# Altium PCB ESC_GEMINI.PcbDoc (part 2 of 4)
Units mm, origin at the board's own origin, x right, y up, seen from the top; angles counter-clockwise.
Board outline 12 x 35 mm, 6 copper layers (F.Cu, In1.Cu, In2.Cu, In3.Cu, In4.Cu, B.Cu); 97 components, 64 nets, 285 pads, 618 vias.
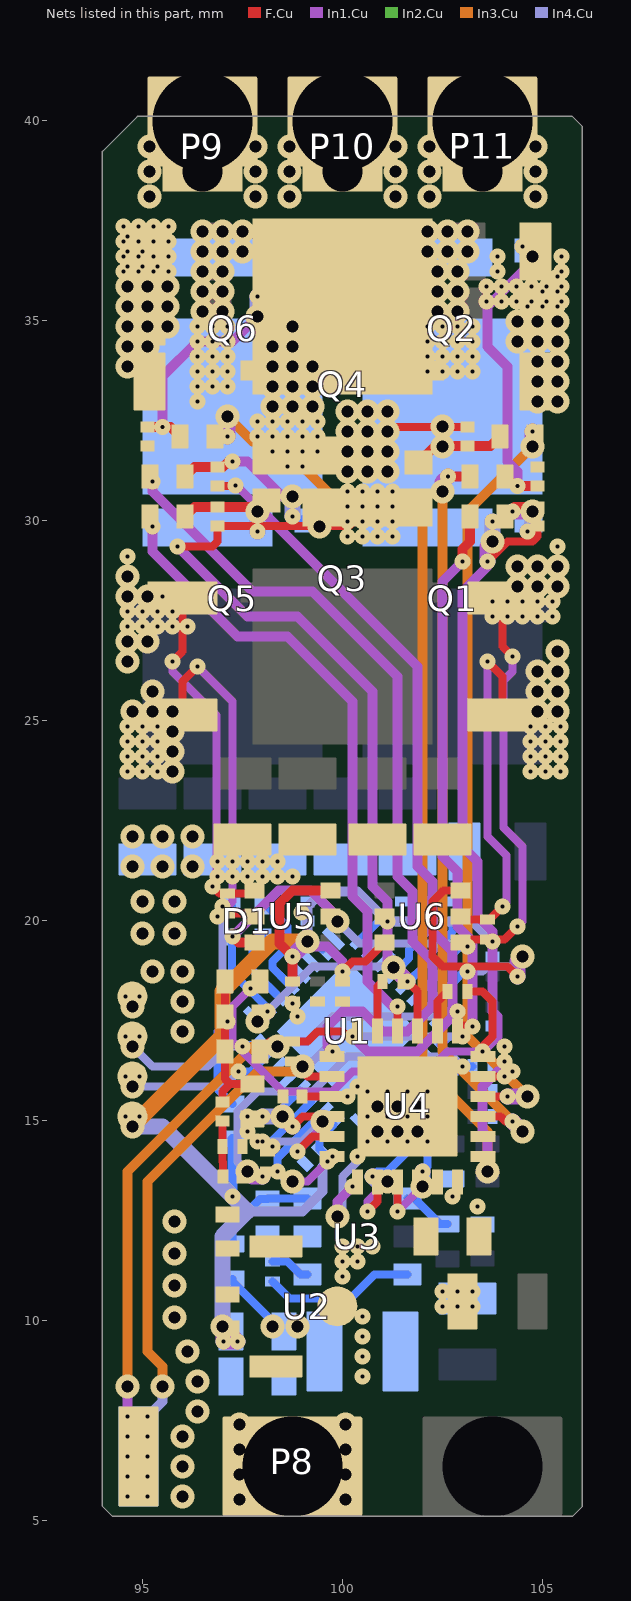
[diagram p6: the nets of this part, all layers, seen from the top]

## Design rules (kind name [scope] priority, off if disabled: settings) (continued)
PolygonConnect Polygon_F.Cu-/CTRL/VREF_U_ConnectDirect [IsNamedPolygon('F.Cu-/CTRL/VREF_U')] p219: connectstyle=Direct reliefconductorwidth=0.254 reliefentries=4 polygonreliefangle="90 Angle" airgapwidth=0.254
PolygonConnect Polygon_F.Cu-+3V3-4_ConnectDirect [IsNamedPolygon('F.Cu-+3V3-4')] p220: connectstyle=Direct reliefconductorwidth=0.254 reliefentries=4 polygonreliefangle="90 Angle" airgapwidth=0.254
PolygonConnect Polygon_F.Cu-VBUS-1_ConnectDirect [IsNamedPolygon('F.Cu-VBUS-1')] p221: connectstyle=Direct reliefconductorwidth=0.254 reliefentries=4 polygonreliefangle="90 Angle" airgapwidth=0.254
PolygonConnect Polygon_F.Cu-/GND_A-2_ConnectDirect [IsNamedPolygon('F.Cu-/GND_A-2')] p222: connectstyle=Direct reliefconductorwidth=0.254 reliefentries=4 polygonreliefangle="90 Angle" airgapwidth=0.254
PolygonConnect Polygon_F.Cu-/CTRL/PWM-AP_ConnectDirect [IsNamedPolygon('F.Cu-/CTRL/PWM-AP')] p223: connectstyle=Direct reliefconductorwidth=0.254 reliefentries=4 polygonreliefangle="90 Angle" airgapwidth=0.254
PolygonConnect Polygon_F.Cu-Net-(U4-TG_C)_ConnectDirect [IsNamedPolygon('F.Cu-Net-(U4-TG_C)')] p224: connectstyle=Direct reliefconductorwidth=0.254 reliefentries=4 polygonreliefangle="90 Angle" airgapwidth=0.254
PolygonConnect Polygon_F.Cu-+3V3-3_ConnectDirect [IsNamedPolygon('F.Cu-+3V3-3')] p225: connectstyle=Direct reliefconductorwidth=0.254 reliefentries=4 polygonreliefangle="90 Angle" airgapwidth=0.254
PolygonConnect Polygon_F.Cu-/GND_A-1_ConnectDirect [IsNamedPolygon('F.Cu-/GND_A-1')] p226: connectstyle=Direct reliefconductorwidth=0.254 reliefentries=4 polygonreliefangle="90 Angle" airgapwidth=0.254
PolygonConnect Polygon_F.Cu-/CTRL/PHB-1_ConnectDirect [IsNamedPolygon('F.Cu-/CTRL/PHB-1')] p227: connectstyle=Direct reliefconductorwidth=0.254 reliefentries=4 polygonreliefangle="90 Angle" airgapwidth=0.254
PolygonConnect Polygon_F.Cu-Net-(Q6-Gate)-1_ConnectDirect [IsNamedPolygon('F.Cu-Net-(Q6-Gate)-1')] p228: connectstyle=Direct reliefconductorwidth=0.254 reliefentries=4 polygonreliefangle="90 Angle" airgapwidth=0.254
PolygonConnect Polygon_F.Cu-Net-(Q1-Gate)-1_ConnectDirect [IsNamedPolygon('F.Cu-Net-(Q1-Gate)-1')] p229: connectstyle=Direct reliefconductorwidth=0.254 reliefentries=4 polygonreliefangle="90 Angle" airgapwidth=0.254
PolygonConnect Polygon_F.Cu-Net-(Q1-Gate)_ConnectDirect [IsNamedPolygon('F.Cu-Net-(Q1-Gate)')] p230: connectstyle=Direct reliefconductorwidth=0.254 reliefentries=4 polygonreliefangle="90 Angle" airgapwidth=0.254
PolygonConnect Polygon_F.Cu-+3V3-2_ConnectDirect [IsNamedPolygon('F.Cu-+3V3-2')] p231: connectstyle=Direct reliefconductorwidth=0.254 reliefentries=4 polygonreliefangle="90 Angle" airgapwidth=0.254
PolygonConnect Polygon_F.Cu-+6V_ConnectDirect [IsNamedPolygon('F.Cu-+6V')] p232: connectstyle=Direct reliefconductorwidth=0.254 reliefentries=4 polygonreliefangle="90 Angle" airgapwidth=0.254
PolygonConnect Polygon_F.Cu-Net-(Q5-Gate)_ConnectDirect [IsNamedPolygon('F.Cu-Net-(Q5-Gate)')] p233: connectstyle=Direct reliefconductorwidth=0.254 reliefentries=4 polygonreliefangle="90 Angle" airgapwidth=0.254
PolygonConnect Polygon_F.Cu-/CTRL/BEMF_U_ConnectDirect [IsNamedPolygon('F.Cu-/CTRL/BEMF_U')] p234: connectstyle=Direct reliefconductorwidth=0.254 reliefentries=4 polygonreliefangle="90 Angle" airgapwidth=0.254
PolygonConnect Polygon_F.Cu-/CTRL/PWM-BN_ConnectDirect [IsNamedPolygon('F.Cu-/CTRL/PWM-BN')] p235: connectstyle=Direct reliefconductorwidth=0.254 reliefentries=4 polygonreliefangle="90 Angle" airgapwidth=0.254
PolygonConnect Polygon_F.Cu-/CTRL/I_SNS_B_ConnectDirect [IsNamedPolygon('F.Cu-/CTRL/I_SNS_B')] p236: connectstyle=Direct reliefconductorwidth=0.254 reliefentries=4 polygonreliefangle="90 Angle" airgapwidth=0.254
PolygonConnect Polygon_F.Cu-/CTRL/PHC-1_ConnectDirect [IsNamedPolygon('F.Cu-/CTRL/PHC-1')] p237: connectstyle=Direct reliefconductorwidth=0.254 reliefentries=4 polygonreliefangle="90 Angle" airgapwidth=0.254
PolygonConnect Polygon_F.Cu-GND-1_ConnectDirect [IsNamedPolygon('F.Cu-GND-1')] p238: connectstyle=Direct reliefconductorwidth=0.254 reliefentries=4 polygonreliefangle="90 Angle" airgapwidth=0.254
PolygonConnect Polygon_F.Cu-/GND_C-2_ConnectDirect [IsNamedPolygon('F.Cu-/GND_C-2')] p239: connectstyle=Direct reliefconductorwidth=0.254 reliefentries=4 polygonreliefangle="90 Angle" airgapwidth=0.254
PolygonConnect Polygon_F.Cu-/CTRL/PHB_ConnectDirect [IsNamedPolygon('F.Cu-/CTRL/PHB')] p240: connectstyle=Direct reliefconductorwidth=0.254 reliefentries=4 polygonreliefangle="90 Angle" airgapwidth=0.254
PolygonConnect Polygon_F.Cu-Net-(U4-TG_B)_ConnectDirect [IsNamedPolygon('F.Cu-Net-(U4-TG_B)')] p241: connectstyle=Direct reliefconductorwidth=0.254 reliefentries=4 polygonreliefangle="90 Angle" airgapwidth=0.254
PolygonConnect Polygon_F.Cu-/CTRL/PHA_ConnectDirect [IsNamedPolygon('F.Cu-/CTRL/PHA')] p242: connectstyle=Direct reliefconductorwidth=0.254 reliefentries=4 polygonreliefangle="90 Angle" airgapwidth=0.254
PolygonConnect Polygon_F.Cu-GND_ConnectDirect [IsNamedPolygon('F.Cu-GND')] p243: connectstyle=Direct reliefconductorwidth=0.254 reliefentries=4 polygonreliefangle="90 Angle" airgapwidth=0.254
PolygonConnect Polygon_F.Cu-+3V3-1_ConnectDirect [IsNamedPolygon('F.Cu-+3V3-1')] p244: connectstyle=Direct reliefconductorwidth=0.254 reliefentries=4 polygonreliefangle="90 Angle" airgapwidth=0.254
PolygonConnect Polygon_F.Cu-VBUS_ConnectDirect [IsNamedPolygon('F.Cu-VBUS')] p245: connectstyle=Direct reliefconductorwidth=0.254 reliefentries=4 polygonreliefangle="90 Angle" airgapwidth=0.254
PolygonConnect Polygon_F.Cu-/CTRL/PHC_ConnectDirect [IsNamedPolygon('F.Cu-/CTRL/PHC')] p246: connectstyle=Direct reliefconductorwidth=0.254 reliefentries=4 polygonreliefangle="90 Angle" airgapwidth=0.254
PolygonConnect Polygon_F.Cu-/GND_C-1_ConnectDirect [IsNamedPolygon('F.Cu-/GND_C-1')] p247: connectstyle=Direct reliefconductorwidth=0.254 reliefentries=4 polygonreliefangle="90 Angle" airgapwidth=0.254
PolygonConnect Polygon_F.Cu-/CTRL/I_SNS_A_ConnectDirect [IsNamedPolygon('F.Cu-/CTRL/I_SNS_A')] p248: connectstyle=Direct reliefconductorwidth=0.254 reliefentries=4 polygonreliefangle="90 Angle" airgapwidth=0.254
PolygonConnect Polygon_F.Cu-Net-(Q6-Gate)_ConnectDirect [IsNamedPolygon('F.Cu-Net-(Q6-Gate)')] p249: connectstyle=Direct reliefconductorwidth=0.254 reliefentries=4 polygonreliefangle="90 Angle" airgapwidth=0.254
PolygonConnect Polygon_F.Cu-/CTRL/PWM-BP_ConnectDirect [IsNamedPolygon('F.Cu-/CTRL/PWM-BP')] p250: connectstyle=Direct reliefconductorwidth=0.254 reliefentries=4 polygonreliefangle="90 Angle" airgapwidth=0.254
PolygonConnect Polygon_F.Cu-Net-(U4-BG_A)_ConnectDirect [IsNamedPolygon('F.Cu-Net-(U4-BG_A)')] p251: connectstyle=Direct reliefconductorwidth=0.254 reliefentries=4 polygonreliefangle="90 Angle" airgapwidth=0.254
PolygonConnect Polygon_F.Cu-/GND_A_ConnectDirect [IsNamedPolygon('F.Cu-/GND_A')] p252: connectstyle=Direct reliefconductorwidth=0.254 reliefentries=4 polygonreliefangle="90 Angle" airgapwidth=0.254
PolygonConnect Polygon_F.Cu-Net-(Q2-Gate)_ConnectDirect [IsNamedPolygon('F.Cu-Net-(Q2-Gate)')] p253: connectstyle=Direct reliefconductorwidth=0.254 reliefentries=4 polygonreliefangle="90 Angle" airgapwidth=0.254
PolygonConnect Polygon_F.Cu-/GND_C_ConnectDirect [IsNamedPolygon('F.Cu-/GND_C')] p254: connectstyle=Direct reliefconductorwidth=0.254 reliefentries=4 polygonreliefangle="90 Angle" airgapwidth=0.254
PolygonConnect Polygon_F.Cu-+3V3_ConnectDirect [IsNamedPolygon('F.Cu-+3V3')] p255: connectstyle=Direct reliefconductorwidth=0.254 reliefentries=4 polygonreliefangle="90 Angle" airgapwidth=0.254
RoutingVias [All] p1: holewidth=0.711 width=1.27 viastyle="Through Hole" minholewidth=0.711 minwidth=1.27 maxholewidth=0.711 maxwidth=1.27
SilkToSilkClearance [All] p1: silktosilkclearance=0
SilkToSolderMaskClearance [IsPad] p1: minsilkscreentomaskgap=0 clearancetoexposedcopper=TRUE
SolderMaskExpansion [All] p1: expansion=0.102 istentingtop=FALSE
Width [All] p1: maxlimit=10 minlimit=0.254 preferedwidth=0.254 minimp=50.000000 maximp=50.000000 favimp=50.000000
27 further rules are at their usual default settings.

## Components (designator, comment, footprint, x,y, rotation, side; value= is the part's Value field where it differs from the comment)
C2 "10uF" C0805(2012M)#1 99.125,22.85 r270 top
C3 "10uF" C0805(2012M)#1 100.875,22.85 r270 top
C4 "10uF" C0805(2012M)#1 102.5,22.85 r270 top
C7 "10uF" C0805(2012M)#2 95.125,22.35 r90 bottom
C8 "10uF" C0805(2012M)#2 96.75,22.35 r90 bottom
C9 "10uF" C0805(2012M)#2 98.375,22.35 r90 bottom
C10 "10uF" C0805(2012M)#2 100,22.35 r90 bottom
C11 "10uF" C0805(2012M)#2 101.625,22.35 r90 bottom
C12 "10uF" C0805(2012M)#2 103.875,21.725 r0 bottom
C13 "10uF" C0805(2012M)#1 97.5,22.85 r270 top
C14 "10uF" C0805(2012M)#1 96,33.475 r180 top
C16 "10uF" C0805(2012M)#1 104,33.475 r0 top
C17 "10nF" C0201(0603M)#1 103.5,15.725 r180 bottom
C18 "100nF" C0201(0603M)#1 102.125,20.225 r270 bottom
C19 "10nF" C0201(0603M)#1 103.5,16.35 r180 bottom
C20 "100nF" C0201(0603M)#1 101.5,20.225 r270 bottom
C21 "100nF" C0201(0603M)#1 99.25,14.1 r45 bottom
C22 "100nF" C0201(0603M)#1 102.75,20.225 r270 bottom
C24 "10uF" C0805(2012M)#2 103.125,9.725 r270 bottom
C25 "1uF" C0402(1005M)#1 97.125,12.225 r270 top
C26 "100nF" C0402(1005M)#2 103.5,11.975 r270 bottom
C27 "10nF" C0201(0603M)#2 97.25,14.35 r0 top
C28 "1uF" C0402(1005M)#1 97.125,10.225 r90 top
C29 "10nF" C0201(0603M)#2 98.125,13.975 r90 top
C30 "100nF" C0201(0603M)#1 98.25,11.225 r90 bottom
C31 "10nF" C0201(0603M)#1 103.5,15.1 r180 bottom
C33 "10uF" C0603(1608M)#1 97.875,9.725 r0 bottom
C34 "10uF" C0603(1608M)#1 97.875,8.6 r0 bottom
C41 "10uF" C0603(1608M)#2 102.75,12.1 r0 top
C42 "1uF" C0201(0603M)#2 102.875,18.225 r0 top
C43 "1uF" C0201(0603M)#2 101.25,18.475 r0 top
C44 "1uF" C0201(0603M)#2 98.75,16.725 r90 top
C45 "100nF" C0201(0603M)#2 100,18.225 r270 top
C46 "10nF" C0201(0603M)#2 99.375,18.225 r270 top
C47 "100nF" C0201(0603M)#2 98.75,18.225 r270 top
C48 "100pF" C0201(0603M)#2 103.625,19.775 r90 top
C49 "100pF" C0201(0603M)#2 97.125,20.425 r270 top
C50 "10uF" C0805(2012M)#1 96,35.1 r180 top
C51 "10uF" C0805(2012M)#1 96,36.725 r180 top
C53 "10uF" C0805(2012M)#1 104,35.1 r0 top
C54 "10uF" C0805(2012M)#1 104,36.725 r0 top
D1 "NH-B1010RGBT-HF" LED-4_1010 97.625,19.975 r0 bottom
L1 "22uH" MC-2520 100.5,9.225 r0 bottom
P1 "V" SMP-C_b7 94.75,15.1 r0 top
P2 "G" SMP-C_b7 94.75,18.1 r0 top
P3 "TX" SMP-Q_2510 94.9,6.6 r90 top
P4 "RX" SMP-Q_2510 94.9,6.6 r90 bottom
P5 "D" SMP-C_b7 94.75,16.1 r0 top
P6 "K" SMP-C_b7 94.75,17.1 r0 top
P7 "Solder Pad" EGP-Q_3525 103.75,5.1 r0 top
P8 "Solder Pad" EGP-Q_3525 98.75,5.1 r0 top
P9 "Solder Pad" EGP-Q_2722 96.5,40.225 r180 top
P10 "Solder Pad" EGP-Q_2722 100,40.225 r180 top
P11 "Solder Pad" EGP-Q_2722 103.5,40.225 r180 top
Q1 "HSBA4052" SON-FET_6050#1 102.75,27.1 r180 bottom
Q2 "HSBA4052" SON-FET_6050#2 102.75,33.85 r180 bottom
Q3 "HSBA4052" SON-FET_6050#3 100,27.6 r180 top
Q4 "HSBA4052" SON-FET_6050#3 100,34.35 r0 top
Q5 "HSBA4052" SON-FET_6050#1 97.25,27.1 r180 bottom
Q6 "HSBA4052" SON-FET_6050#4 97.25,33.85 r180 bottom
R1 "10k" R0201(0603M)#1 99.125,20.225 r270 bottom
R2 "11k" R0402(1005M)#1 97.5,16.725 r180 top
R3 "11k" R0402(1005M)#1 97.5,17.6 r180 top
R4 "680R" R0402(1005M)#1 97.75,15.475 r270 top
R5 "11k" R0402(1005M)#1 97.5,18.475 r180 top
R6 "100" R0201(0603M)#2 97,15.225 r270 top
R7 "1Meg" R0402(1005M)#2 102.625,11.975 r270 bottom
R8 "100" R0201(0603M)#2 97.25,13.6 r0 top
R9 "10k" R0201(0603M)#1 103.75,18.85 r90 bottom
R10 "10k" R0201(0603M)#1 103.75,17.6 r90 bottom
R11 "68k" R0402(1005M)#2 97.25,11.475 r270 bottom
R12 "11k" R0402(1005M)#2 98.125,12.6 r270 bottom
R13 "11k" R0402(1005M)#2 103.625,13.975 r270 bottom
R14 "1k" R0402(1005M)#2 102.75,13.975 r90 bottom
R15 "330R" R0402(1005M)#2 97.25,14.975 r270 bottom
R16 "100k" R0201(0603M)#2 98.75,15.6 r0 top
R17 "2.2R" R0402(1005M)#1 103.625,30.1 r0 top
R18 "2.2R" R0402(1005M)#1 103.625,31.1 r0 top
R19 "2.2R" R0402(1005M)#1 95.625,30.1 r0 top
R20 "2.2R" R0402(1005M)#1 104.375,32.1 r180 top
R21 "10k" R0201(0603M)#2 104.875,30.1 r270 top
R22 "10k" R0201(0603M)#2 104.875,31.1 r90 top
R23 "2.2R" R0402(1005M)#1 95.625,31.1 r0 top
R24 "2.2R" R0402(1005M)#1 96.375,32.1 r180 top
R25 "10k" R0201(0603M)#2 96.875,30.1 r270 top
R26 "10k" R0201(0603M)#2 103.125,32.1 r90 top
R27 "1mR" R1206(3216M) 104,26.6 r90 top
R28 "10k" R0201(0603M)#2 96.875,31.1 r270 top
R29 "10k" R0201(0603M)#2 95.125,32.1 r270 top
R30 "1mR" R1206(3216M) 96,26.6 r90 top
R31 "SDV2012A300C181NPTF" R0805(2012M) 103.875,10.475 r0 top
U1 "AT32F413KCU7-4" QFN-32_4040 100.125,17.225 r45 bottom
U2 "GM7333" SOT-89_4525 99.875,10.35 r180 top
U3 "LGS5148" SOT-23-6 100.375,12.1 r0 bottom
U4 "DRV8300D" QFN-24_4040 101.625,15.35 r90 top
U5 "INA199A1" SOT-363 98.75,20.1 r0 top
U6 "INA199A1" SOT-363 102,20.1 r180 top

## Footprints (in the part's own frame and the unit in brackets; to place one, negate y for a bottom-side part, rotate by r counter-clockwise, add the part's x,y. Pads: shape width x height; smd on the part's side, far side on the other; paste and mask are expansions set on the pad)
C0201(0603M)#1 [mm]
  rrect5% 0.25x0.375 smd paste-0.032 mask+0.025: 1(0.25,0) 2(-0.25,0)
  silkscreen extent -0.35,-0.29 0.35,0.29
C0201(0603M)#2 [mm]
  rrect5% 0.25x0.375 smd paste-0.032 mask+0.025: 1(-0.25,0) 2(0.25,0)
  silkscreen extent -0.35,-0.29 0.35,0.29
C0402(1005M)#1 [mm]
  rrect5% 0.4x0.6 smd paste-0.05 mask+0.05: 1(-0.425,0) 2(0.425,0)
  silkscreen extent -0.6,-0.45 0.6,0.45
C0402(1005M)#2 [mm]
  rrect5% 0.4x0.6 smd paste-0.05 mask+0.05: 1(0.425,0) 2(-0.425,0)
  silkscreen extent -0.6,-0.45 0.6,0.45
C0603(1608M)#1 [mm]
  rrect5% 0.625x0.95 smd paste-0.95 mask+0.05: 1(0.663,0) 2(-0.663,0)
  silkscreen extent -0.95,-0.63 0.95,0.63
C0603(1608M)#2 [mm]
  rrect5% 0.625x0.95 smd paste-0.95 mask+0.05: 1(-0.663,0) 2(0.663,0)
  silkscreen extent -0.95,-0.63 0.95,0.63
C0805(2012M)#1 [mm]
  rrect5% 0.8x1.45 smd paste-1.45 mask+0.05: 1(-0.825,0) 2(0.825,0)
C0805(2012M)#2 [mm]
  rrect5% 0.8x1.45 smd paste-1.45 mask+0.05: 1(0.825,0) 2(-0.825,0)
EGP-Q_2722 [mm]
  rect 1x1.5 hole 1 slot 2.5 at 90 deg paste-1.5 mask+0.05: PAD(-0.5,0.25) PAD(0.5,0.25)
  rect 2x1 hole 1 slot 2 at 0 deg paste-2 mask+0.05: PAD(0,1.5)
  rrect5% 2.75x2.25 hole 2.5 slot 2 at 0 deg paste-2.75 mask+0.05: PAD(0,0.25)
EGP-Q_3525 [mm]
  rect 1x1.5 hole 1 slot 2.5 at 90 deg paste-1.5 mask+0.05: PAD(-0.5,1.25) PAD(0.5,1.25)
  rrect5% 3.5x2.5 hole 2.5 slot 2 at 0 deg paste-3.5 mask+0.05: PAD(0,1.25)
  rect 2x1 hole 1 slot 2 at 0 deg paste-2 mask+0.05: PAD(0,1.5)
LED-4_1010 [mm]
  rrect5% 0.425x0.425 smd paste-0.05 mask+0.05: 1(-0.387,-0.387) 2(0.387,-0.387) 3(0.387,0.387) 4(-0.387,0.387)
  silkscreen extent -0.95,-0.75 0.75,0.75
MC-2520 [mm]
  rrect5% 0.9x2 smd paste-0.1 mask+0.05: 1(0.95,0) 2(-0.95,0)
  silkscreen extent -1.35,-1.17 1.35,1.17
QFN-24_4040 [mm]
  rrect5% 0.625x0.275 smd paste-0.05 mask+0.025: 1(-1.887,1.25) 2(-1.887,0.75) 3(-1.887,0.25) 4(-1.887,-0.25) 5(-1.887,-0.75) 6(-1.887,-1.25) 13(1.887,-1.25) 14(1.887,-0.75) 15(1.887,-0.25) 16(1.887,0.25) 17(1.887,0.75) 18(1.887,1.25)
  rrect5% 0.275x0.625 smd paste-0.05 mask+0.025: 7(-1.25,-1.887) 8(-0.75,-1.887) 9(-0.25,-1.887) 10(0.25,-1.887) 11(0.75,-1.887) 12(1.25,-1.887) 19(1.25,1.887) 20(0.75,1.887) 21(0.25,1.887) 22(-0.25,1.887) 23(-0.75,1.887) 24(-1.25,1.887)
  rrect2% 2.5x2.5 smd paste-2.5 mask+0.05: EP(0,0)
  silkscreen extent -2.3,-2.1 2.1,2.3
QFN-32_4040 [mm]
  rrect5% 0.625x0.2 smd paste-0.05 mask+0.025: 1(1.887,-1.4) 2(1.887,-1) 3(1.887,-0.6) 4(1.888,-0.2) 5(1.888,0.2) 6(1.887,0.6) 7(1.887,1) 8(1.887,1.4) 17(-1.887,1.4) 18(-1.887,1) 19(-1.887,0.6) 20(-1.888,0.2) 21(-1.888,-0.2) 22(-1.887,-0.6) 23(-1.887,-1) 24(-1.887,-1.4)
  rrect5% 0.2x0.625 smd paste-0.05 mask+0.025: 9(1.4,1.887) 10(1,1.887) 11(0.6,1.887) 12(0.2,1.888) 13(-0.2,1.888) 14(-0.6,1.887) 15(-1,1.887) 16(-1.4,1.887) 25(-1.4,-1.887) 26(-1,-1.887) 27(-0.6,-1.887) 28(-0.2,-1.888) 29(0.2,-1.888) 30(0.6,-1.887) 31(1,-1.887) 32(1.4,-1.887)
  rrect2% 2.5x2.5 smd paste-2.5 mask+0.05: EP(0,0)
  silkscreen extent -2.1,-2.3 2.3,2.1
R0201(0603M)#1 [mm]
  rrect5% 0.275x0.35 smd paste-0.032 mask+0.025: 1(0.238,0) 2(-0.238,0)
  silkscreen extent -0.35,-0.28 0.35,0.28
R0201(0603M)#2 [mm]
  rrect5% 0.275x0.35 smd paste-0.032 mask+0.025: 1(-0.238,0) 2(0.238,0)
  silkscreen extent -0.35,-0.28 0.35,0.28
R0402(1005M)#1 [mm]
  rrect5% 0.425x0.6 smd paste-0.05 mask+0.05: 1(-0.437,0) 2(0.437,0)
  silkscreen extent -0.63,-0.45 0.63,0.45
R0402(1005M)#2 [mm]
  rrect5% 0.425x0.6 smd paste-0.05 mask+0.05: 1(0.437,0) 2(-0.437,0)
  silkscreen extent -0.63,-0.45 0.63,0.45
R0805(2012M) [mm]
  rrect5% 0.75x1.4 smd paste-1.4 mask+0.05: 1(-0.875,0) 2(0.875,0)
  silkscreen extent -1.2,-0.87 1.2,0.87
R1206(3216M) [mm]
  rrect5% 0.825x1.75 smd paste-1.75 mask+0.05: 1(-1.462,0) 2(1.462,0)
  silkscreen extent -1.83,-1.05 1.83,1.05
SMP-C_b7 [mm]
  round 0.75 smd paste-0.2 mask+0.05: PAD(0,0)
SMP-Q_2510 [mm]
  rrect5% 2.5x1 smd paste-0.1 mask+0.05: PAD(0,0)
SON-FET_6050#1 [mm]
  rrect5% 0.5x0.5 smd paste-0.5 mask+0.05: D(-2.3,0.6) D(2.3,0.6)
  rect 4.5x4.4 smd paste-4.5 mask-4.5: D(0,-1)
  rect 0.7x0.6 smd paste-0.05 mask+0.05: G(-1.9,2.9)
  rect 3.25x0.95 smd paste-3.25 mask-3.25: S(0.625,2.725)
  silkscreen extent -2.75,-3.1 2.75,3.57
SON-FET_6050#2 [mm]
  rrect5% 0.4x0.5 smd paste-0.5 mask+0.05: D(-2.25,0.6)
  rect 4.5x4.4 smd paste-4.5 mask-4.5: D(0,-1)
  rrect5% 0.45x0.5 smd paste-0.5 mask+0.05: D(2.275,0.6)
  rect 0.7x0.6 smd paste-0.05 mask+0.05: G(-1.9,2.9)
  rect 3.25x0.95 smd paste-3.25 mask-3.25: S(0.625,2.725)
  silkscreen extent -2.75,-3.1 2.75,3.57
SON-FET_6050#3 [mm]
  rrect5% 0.5x0.5 smd paste-0.5 mask+0.05: D(-2.3,-0.6) D(2.3,-0.6)
  rect 4.5x4.4 smd paste-4.5 mask-4.5: D(0,1)
  rect 0.7x0.6 smd paste-0.05 mask+0.05: G(1.9,-2.9)
  rect 3.25x0.95 smd paste-3.25 mask-3.25: S(-0.625,-2.725)
  silkscreen extent -2.75,-3.57 2.75,3.1
SON-FET_6050#4 [mm]
  rrect5% 0.45x0.5 smd paste-0.5 mask+0.05: D(-2.275,0.6)
  rect 4.5x4.4 smd paste-4.5 mask-4.5: D(0,-1)
  rrect5% 0.4x0.5 smd paste-0.5 mask+0.05: D(2.25,0.6)
  rect 0.7x0.6 smd paste-0.05 mask+0.05: G(-1.9,2.9)
  rect 3.25x0.95 smd paste-3.25 mask-3.25: S(0.625,2.725)
  silkscreen extent -2.75,-3.1 2.75,3.57
SOT-23-6 [mm]
  rrect5% 0.7x0.55 smd mask+0.05: 1(-1.25,0.95) 2(-1.25,0) 3(-1.25,-0.95) 4(1.25,-0.95) 5(1.25,0) 6(1.25,0.95)
  silkscreen extent -0.7,-1.55 0.7,1.55
SOT-89_4525 [mm]
  rrect5% 1.325x0.55 smd paste-0.1 mask+0.05: 1(1.538,-1.5) 3(1.538,1.5)
  round 1 smd paste-1 mask+0.05: 2(0,0)
  F.Cu region: 0.7,0.45 0.7,0.275 0.75,0.225 2.15,0.225 2.15,-0.225 0.75,-0.225 0.7,-0.275 0.7,-0.45 0.325,-0.825 -2.1,-0.825 -2.15,-0.775 -2.15,0.775 -2.1,0.825 0.325,0.825
  silkscreen extent -1.6,-2.35 1.1,2.35
SOT-363 [mm]
  rrect5% 0.5x0.4 smd mask+0.05: 1(0.95,-0.65) 2(0.95,0) 3(0.95,0.65) 4(-0.95,0.65) 5(-0.95,0) 6(-0.95,-0.65)
  silkscreen extent -0.5,-1.2 1.15,1.1

## Part data
C2 C3 C4 C7 C8 C9 C10 C11 C12 C13 C14 C16 C24 C50 C51 C53 C54: library part C0805(2012M), Symbol type="Alternate Source"
  C2 C3 C4 C7 C8 C9 C10 C11 C12 C13 C14 C16 C50 C51 C53 C54: Sheetfile=ESC_SGL.kicad_sch
  C24: Sheetfile=ESC-CTRL.kicad_sch, Sheetname=CTRL
C17 C18 C19 C20 C21 C22 C27 C29 C30 C31 C42 C43 C44 C45 C46 C47 C48 C49: library part C0201(0603M), Symbol type="Alternate Source"
  C17 C18 C19 C20 C21 C22 C27 C29 C30 C31: Sheetfile=ESC-CTRL.kicad_sch, Sheetname=CTRL
  C42 C43 C44 C45 C46 C47 C48 C49: Sheetfile=PowerStack.kicad_sch, Sheetname=PowerStack
C25 C26 C28: library part C0402(1005M), Sheetfile=ESC-CTRL.kicad_sch, Sheetname=CTRL, Symbol type="Alternate Source"
C33 C34 C41: library part C0603(1608M), Symbol type="Alternate Source"
  C33 C34: Sheetfile=ESC-CTRL.kicad_sch, Sheetname=CTRL
  C41: Sheetfile=PowerStack.kicad_sch, Sheetname=PowerStack
D1: library part LED-4_1010, Sheetfile=ESC-CTRL.kicad_sch, Sheetname=CTRL
L1: library part MC-2520, Sheetfile=ESC-CTRL.kicad_sch, Sheetname=CTRL, Symbol type="Alternate Source"
P1 P2 P5 P6: library part SMP-C_b7, Sheetfile=ESC-CTRL.kicad_sch, Sheetname=CTRL, Symbol type="Alternate Source"
P3 P4: library part SMP-Q_2510, Sheetfile=ESC-CTRL.kicad_sch, Sheetname=CTRL, Symbol type="Alternate Source"
P7 P8: library part EGP-Q_3525, Sheetfile=ESC_SGL.kicad_sch, Symbol type="Alternate Source"
P9 P10 P11: library part EGP-Q_2722, Sheetfile=PowerStack.kicad_sch, Sheetname=PowerStack, Symbol type="Alternate Source"
Q1 Q2 Q3 Q4 Q5 Q6: library part SON-FET_6050, "Footprint for single MOSFET", Sheetfile=PowerStack.kicad_sch, Sheetname=PowerStack, Symbol type="Specified Device", ki_description=N_40V_50A_10.5m(6.9m)ohm_5.8n(12.5n)C_27.8W
R1 R6 R8 R9 R10 R16 R21 R22 R25 R26 R28 R29: library part R0201(0603M), Symbol type="Alternate Source"
  R1 R6 R8 R9 R10: Sheetfile=ESC-CTRL.kicad_sch, Sheetname=CTRL
  R16 R21 R22 R25 R26 R28 R29: Sheetfile=PowerStack.kicad_sch, Sheetname=PowerStack
R2 R3 R4 R5 R7 R11 R12 R13 R14 R15 R17 R18 R19 R20 R23 R24: library part R0402(1005M), Symbol type="Alternate Source"
  R2 R3 R4 R5 R7 R11 R12 R13 R14 R15: Sheetfile=ESC-CTRL.kicad_sch, Sheetname=CTRL
  R17 R18 R19 R20 R23 R24: Sheetfile=PowerStack.kicad_sch, Sheetname=PowerStack
R27 R30: library part R1206(3216M), Sheetfile=PowerStack.kicad_sch, Sheetname=PowerStack, Symbol type="Alternate Source"
R31: library part R0805(2012M), Sheetfile=ESC_SGL.kicad_sch, Symbol type="Alternate Source"
U1: library part QFN-32_4040, Sheetfile=ESC-CTRL.kicad_sch, Sheetname=CTRL, Symbol type="Specified Device", ki_description="Cortex-M4 200MHz, AT32F4 series."
U2: library part SOT-89_4525, Sheetfile=ESC-CTRL.kicad_sch, Sheetname=CTRL, Symbol type="Alternate Source", ki_description="Alternative group of 3 pins LDO (Pinout B)."
U3: library part SOT-23-6, LCSC=C5123972, Sheetfile=ESC-CTRL.kicad_sch, Sheetname=CTRL, Symbol type="Specified Device", ki_description=4.5-48V_0.6A_0.9MHz
U4: library part QFN-24_4040, Sheetfile=PowerStack.kicad_sch, Sheetname=PowerStack
U5 U6: library part SOT-363, Sheetfile=PowerStack.kicad_sch, Sheetname=PowerStack, Symbol type="Specified Device", ki_description=CS-S_2.7-26Vs_n0.3-26Vcm_50V/V_80kHz

## Via types
v1: diameter 0.4, hole 0.1, F.Cu to In1.Cu, tented both sides, 195 vias
v2: diameter 0.4, hole 0.1, In4.Cu to B.Cu, tented both sides, 187 vias
v3: diameter 0.6, hole 0.3, In1.Cu to In4.Cu, tented both sides, 159 vias
v4: diameter 0.6, hole 0.3, F.Cu to B.Cu, tented both sides, 77 vias

## Nets (pads, with @x,y where several pads share a name; then routed paths per layer and width w, separated by ;. In a path a pad name is that pad's centre, name@x,y a point inside that pad or via, vN(x,y) a via of type N, cw(c..) or ccw(c..) an arc to the next point about the centre after c; other vN are vias at no path point)
+3V3: C20.1 C21.1 C22.1 C28.1 C45.1 C47.1 P1.PAD R9.1 R15.1 U1.1 U1.5 U1.17 U2.3 U5.3 U6.3 | length 38.7
  F.Cu w0.2: C45.1@100,18.475 v1(100,18.725) 100.25,18.975 100.575,18.975 U6.3@101.05,19.45
  F.Cu w0.25: C47.1@98.75,18.475 98.75,18.725 v1(98.75,19.1) 98.425,19.425 98.425,20.425 98.75,20.75 U5.3@99.7,20.75
  In1.Cu w0.25: v3(99.125,19.475) 99.25,19.35 99.625,19.35 100,18.975 v1(100,18.725)
  In1.Cu w0.4: v1(98.75,19.1) v3(99.125,19.475) ; v3(97,9.85) 97.025,9.825 v1(97.025,9.475) v1(97.375,9.475) v3(97,9.85)
  In3.Cu w0.4: v3(94.75,14.85) 97,17.1 97,18.225 98.25,19.475 v3(99.125,19.475)
  In4.Cu w0.25: 97.625,12.725 99,12.725 99.5,13.225 99.5,13.85 v2(99.75,14.1) ; v3(99.125,19.475) 99.125,20.35 99.5,20.725 100.375,20.725 v2(101.125,19.975) 103.25,19.975 v2(103.75,19.475)
  In4.Cu w0.4: v3(94.75,14.85) 95.5,14.85 v2(97.25,13.1) 97.625,12.725 97,12.1 v3(97,9.85)
  B.Cu w0.2: v2(99.75,14.1) 99.604,14.1 C21.1@99.427,14.277 99.427,14.547 U1.17@99.78,14.9 ; U1.1@100.47,19.55 100.895,19.975 C20.1@101.5,19.975 ; U1.5@101.601,18.418 102.1,18.917 102.1,19.075 102.75,19.725 C22.1@102.75,19.975 103.25,19.975 v2(103.75,19.475) R9.1@103.75,19.088
  B.Cu w0.25: v2(97.25,13.1) R15.1@97.25,14.538
  other v1: 94.575,15.1 94.925,15.1
+6V: C25.1 C33.1 C34.1 C41.1 L1.2 R11.1 U2.2 U4.4 | length 1.6
  B.Cu w0.2: R11.1@97.25,11.038 97.25,10.975 98.25,9.975 v4(98.25,9.85)
  other v4: 98.875,9.85
B: D1.2 U1.28 | length 2.6
  B.Cu w0.2: D1.2@98.012,20.363 98.113,20.363 98.625,19.85 98.625,19.35 98.25,18.975 98.25,18.817 U1.28@98.649,18.418
BEMF: R2.2 R3.2 R4.1 R5.2 R6.1 | length 3.7
  F.Cu w0.2: R6.1@97,15.463 97,15.725 97.187,15.913 ; R5.2@97.063,18.475 R3.2@97.063,17.6 R2.2@97.063,16.725 97.063,16.038 97.187,15.913 ; R4.1@97.75,15.913 97.187,15.913
BEMF_U: C19.1 C29.1 R8.2 U1.10 | length 10.6
  F.Cu w0.2: 97.75,13.6 R8.2@97.488,13.6 v1(98,13.6) C29.1@98.125,13.725
  In1.Cu w0.4: v3(97.625,13.725) 97.75,13.6 v1(98,13.6)
  In4.Cu w0.2: v3(97.625,13.725) 97.375,13.975 97.375,15.225 97.875,15.725 99.25,15.725 100.125,16.6 102.75,16.6 v2(103,16.35)
  B.Cu w0.2: U1.10@102.167,16.597 102.539,16.225 102.875,16.225 v2(103,16.35) C19.1@103.25,16.35
G: D1.3 U1.27 | length 1.8
  B.Cu w0.2: D1.3@98.012,19.588 98.012,19.487 97.75,19.225 97.75,18.751 U1.27@98.366,18.135
GND: C2.2 C3.2 C4.2 C7.2 C8.2 C9.2 C10.2 C11.2 C12.2 C13.2 C17.2 C18.2 C19.2 C20.2 C21.2 C22.2 C24.2 C25.2 C26.2 C27.2 C28.2 C29.2 C31.2 C33.2 C34.2 C41.2 C45.2 C46.2 C47.2 C48.2 C49.2 P2.PAD P8.PAD Q4.S R1.2 R4.2 R10.2 R12.1 R14.2 R16.1 R26.2 R27.1 R30.1 R31.1 U1.EP U2.1 U3.2 U4.6 U4.EP U5.2 U5.5 U6.2 U6.5 | length 26.1
  F.Cu w0.2: R30.1@96,25.138 96,25.975 v1(96.375,26.35) ; v1(96.875,20.1) 96.95,20.175 C49.2@97.125,20.175 97.725,20.175 U5.5@97.8,20.1 ; Q4.S@99.375,31.625 100.412,31.625 101.125,32.338 R26.2@103.125,32.338 ; U6.5@102.95,20.1 103.025,20.025 C48.2@103.625,20.025 103.675,20.025 v1(104,20.35) ; v1(103.625,26.475) 104,26.1 R27.1@104,25.138
  In1.Cu w0.2: v1(96.375,26.35) 97.25,25.475 97.25,20.475 v1(96.875,20.1) ; v1(103.625,26.475) 103.625,22.1 104.1,21.625 104.1,20.45 v1(104,20.35)
  In2.Cu w0.5: v3(101.375,14.725) v3(101.875,14.725) v3(101.875,15.35) v3(101.375,15.35) ; v3(101.375,14.725) v3(101.375,15.35) ; v3(101.375,14.725) v3(100.875,14.725) v3(100.875,15.35) v3(101.375,15.35)
  other v1: 98.25,14.35 97.875,14.475 100.625,14.475 101.125,14.475 101.625,14.475 102.125,14.475 97.625,14.725 97.625,15.1 100.625,15.1 101.125,15.1 101.625,15.1 102.125,15.1 100.625,15.725 101.125,15.725 101.625,15.725 102.125,15.725 98.875,17.6 98.75,17.925 94.575,18.1 94.925,18.1 98.975,20.2 94.625,23.725 95,23.725 95.375,23.725 104.7,23.725 105.075,23.725 105.45,23.725 94.625,24.1 95,24.1 95.375,24.1 104.7,24.1 105.075,24.1 105.45,24.1 94.625,24.475 95,24.475 95.375,24.475 104.7,24.475 105.075,24.475 105.45,24.475 94.625,24.85 95,24.85 95.375,24.85 104.7,24.85 105.075,24.85 105.45,24.85 98.625,31.35 99,31.35 98.25,31.725 98.625,31.725 99,31.725 99.375,31.725 97.875,32.1 98.25,32.1 98.625,32.1 99,32.1 99.375,32.1 97.875,32.475 98.25,32.475 98.625,32.475 99,32.475 99.375,32.475
  other v2: 100.5,8.6 100.5,9.1 100.5,9.6 100.5,10.1 102.5,10.35 102.875,10.35 103.25,10.35 102.5,10.725 102.875,10.725 103.25,10.725 100,11.1 100,11.475 100.375,11.475 100,11.85 100.375,11.85 100.75,11.85 103.375,12.85 102.75,13.1 100.125,15.6 100.375,15.85 104.05,16.1 104.05,16.475 104.05,16.85 96.875,21.1 97.25,21.1 97.625,21.1 98,21.1 98.375,21.1 98.75,21.1 96.875,21.475 97.25,21.475 97.625,21.475 98,21.475 98.375,21.475
  other v3: 94.75,17.85 95.75,23.725 95.75,24.225 95.75,24.725 94.75,25.225 95.25,25.225 95.75,25.225 104.875,25.225 105.375,25.225 95.25,25.725 104.875,25.725 105.375,25.725 104.875,26.225 105.375,26.225 105.375,26.725 99.425,29.85 98.25,32.85 98.75,32.85 99.25,32.85 98.25,33.35 98.75,33.35 99.25,33.35 98.25,33.85 98.75,33.85 99.25,33.85 98.25,34.35 98.75,34.35 98.75,34.85
  other v4: 97.425,5.525 100.075,5.525 96,5.6 97.425,6.15 100.075,6.15 96,6.35 97.425,6.775 100.075,6.775 96,7.1 97.425,7.4 100.075,7.4 96.375,7.725 96.375,8.475 96.125,9.225 95.807,10.068 95.807,10.868 95.807,11.668 95.807,12.468 96,17.225 96,17.975 95.25,18.725 96,18.725 95.007,19.668 95.807,19.668 95.007,20.468 95.807,20.468 94.75,21.35 95.5,21.35 96.25,21.35 94.75,22.1 95.5,22.1 96.25,22.1
GND_A: C14.2 C49.1 C50.2 C51.2 Q6.S R29.2 R30.2 U5.4 | length 9
  F.Cu w0.2: v1(95.75,26.475) 96,26.725 R30.2@96,28.062 ; v1(96.75,20.85) 96.925,20.675 C49.1@97.125,20.675 97.725,20.675 U5.4@97.8,20.75
  In1.Cu w0.2: v1(95.75,26.475) 95.75,26.225 96.85,25.125 96.85,20.95 v1(96.75,20.85)
  other v1: 94.625,27.35 95,27.35 95.375,27.35 95.75,27.35 96.125,27.35 94.625,27.725 95,27.725 95.375,27.725 95.75,27.725 95.5,28.1 94.625,36.35 95,36.35 95.375,36.35 94.625,36.725 95,36.725 94.625,37.1
  other v2: 94.625,29.1 94.525,36.225 94.9,36.225 95.275,36.225 95.65,36.225 94.525,36.6 94.9,36.6 95.275,36.6 95.65,36.6 94.525,36.975 94.9,36.975 95.275,36.975 95.65,36.975 94.525,37.35 94.9,37.35 95.275,37.35 95.65,37.35
  other v3: 94.625,26.475 94.625,26.975 95.125,26.975 94.625,28.1 95.125,28.1 94.625,28.6 94.625,33.85 94.625,34.35 95.125,34.35 94.625,34.85 95.125,34.85 95.625,34.85 94.625,35.35 95.125,35.35 95.625,35.35 94.625,35.85 95.125,35.85 95.625,35.85
GND_C: C16.2 C48.1 C53.2 C54.2 Q2.S R22.2 R27.2 U6.4 | length 10.2
  F.Cu w0.2: U6.4@102.95,19.45 103.025,19.525 C48.1@103.625,19.525 104.05,19.525 v1(104.375,19.85) ; R27.2@104,28.062 104,26.85 v1(104.25,26.6)
  In1.Cu w0.2: v1(104.25,26.6) 104.25,26.225 104.025,26 104.025,22.325 104.5,21.85 104.5,19.975 v1(104.375,19.85)
  other v1: 103.75,27.6 104.125,27.6 104.5,27.6 104.875,27.6 105.25,27.6 103.75,27.975 104.125,27.975 104.5,27.975 104.875,27.975 105.25,27.975 104.625,35.35 105,35.35 105.375,35.35 105,35.725 105.375,35.725 105.375,36.1
  other v2: 105.375,29.35 103.6,35.475 103.975,35.475 104.35,35.475 104.725,35.475 105.1,35.475 105.475,35.475 103.6,35.85 103.975,35.85 104.35,35.85 104.725,35.85 105.1,35.85 105.475,35.85 103.875,36.225 105.475,36.225 103.875,36.6 105.475,36.6
  other v3: 104.375,28.35 104.875,28.35 105.375,28.35 104.375,28.85 104.875,28.85 105.375,28.85 102.5,31.85 102.5,32.35 104.875,32.975 105.375,32.975 104.875,33.475 105.375,33.475 104.875,33.975 105.375,33.975 104.375,34.475 104.875,34.475 105.375,34.475 104.375,34.975 104.875,34.975 105.375,34.975
I_SNS_A: U1.6 U5.6 | length 9.4
  F.Cu w0.25: v1(97.25,19.6) 97.4,19.45 U5.6@97.8,19.45
  In1.Cu w0.25: v1(97.25,19.6) 98.4,20.75 99.209,20.75 99.875,20.084 v3(99.875,19.975)
  In4.Cu w0.2: v3(99.875,19.975) 100.425,19.425 103.05,19.425 v2(103.125,19.35)
  B.Cu w0.2: U1.6@101.884,18.135 102.525,18.776 102.525,18.934 102.941,19.35 v2(103.125,19.35)
I_SNS_B: U1.7 U6.6 | length 7.9
  F.Cu w0.2: U6.6@102.95,20.75 102.525,20.75 102.25,20.475 102.25,19.1 102.5,18.85 104.125,18.85 v1(104.375,18.6)
  In1.Cu w0.4: v1(104.375,18.6) 104.375,18.975 v3(104.5,19.1)
  In4.Cu w0.2: v2(103.125,18.725) 103.5,18.725 103.625,18.85 104.25,18.85 v3(104.5,19.1)
  B.Cu w0.2: U1.7@102.167,17.853 103.039,18.725 v2(103.125,18.725)
Net-(C27-Pad1): C27.1 R6.2 R8.1 | length 1.4
  F.Cu w0.2: R6.2@97,14.988 C27.1@97,14.35 97,13.975 97.013,13.963 R8.1@97.013,13.6
Net-(D1-Anode): D1.1 R15.2 | length 5.5
  In4.Cu w0.2: v2(97,20.35) 97,17.6 v2(97.125,17.475)
  B.Cu w0.2: v2(97,20.35) 97.013,20.363 D1.1@97.237,20.363 ; v2(97.125,17.475) 96.875,17.225 96.875,15.788 R15.2@97.25,15.413
Net-(Q1-Gate): Q1.G R17.2 R21.1 | length 2
  F.Cu w0.25: R17.2@104.062,30.1 104.3,30.338 R21.1@104.875,30.338
  In1.Cu w0.4: v1(104.25,30.225) v3(104.75,30.225)
  In4.Cu w0.4: v2(104.625,29.725) 104.75,29.85 v3(104.75,30.225)
Net-(Q2-Gate): Q2.G R18.2 R22.1 | length 7.8
  F.Cu w0.25: R18.2@104.062,31.1 104.3,30.863 R22.1@104.875,30.863
  In1.Cu w0.25: v1(104.375,30.863) 104.375,31.225 104.125,31.475 104.125,33.841 103.625,34.341 103.625,35.35 104.75,36.475 v3(104.75,36.6)
  In4.Cu w0.4: v2(104.5,36.85) v3(104.75,36.6)
Net-(Q3-Gate): Q3.G R19.2 R25.1 | length 2.2
  F.Cu w0.25: R19.2@96.063,30.1 96.3,30.338 R25.1@96.875,30.338 97.938,30.338 Q3.G@98.1,30.5
Net-(Q4-Gate): Q4.G R20.2 R26.1 | length 2.3
  F.Cu w0.25: Q4.G@101.9,31.45 102.313,31.863 R26.1@103.125,31.863 103.7,31.863 R20.2@103.938,32.1
Net-(Q5-Gate): Q5.G R23.2 R28.1 | length 4.1
  F.Cu w0.25: R23.2@96.063,31.1 96.3,31.338 R28.1@96.875,31.338 97.013,31.338 97.15,31.475 v1(97.25,31.475)
  In1.Cu w0.25: v1(97.25,31.475) 97.625,31.475 98.5,30.6 v3(98.75,30.6)
  In4.Cu w0.4: v2(98.75,30.1) v3(98.75,30.6)
  B.Cu w0.25: v2(98.75,30.1) 98.85,30 Q5.G@99.15,30
Net-(Q6-Gate): Q6.G R24.2 R29.1 | length 8.2
  F.Cu w0.25: v1(95.501,32.339) 95.499,32.338 R29.1@95.125,32.338 95.7,32.338 R24.2@95.937,32.1
  In1.Cu w0.25: v1(95.501,32.339) 95.501,33.601 96.375,34.475 97.25,34.475 v3(97.875,35.1)
  In4.Cu w0.4: v3(97.875,35.1) v2(97.875,35.6)
  B.Cu w0.25: v2(97.875,35.6) 98.625,35.6 99.15,36.125 Q6.G@99.15,36.75
Net-(U1A-BOOT0): R1.1 U1.31 | length 0.9
  B.Cu w0.2: R1.1@99.125,19.988 99.125,19.639 U1.31@99.497,19.267
Net-(U1A-{\R\S\T\}\)\: C18.1 U1.4 | length 1.6
  B.Cu w0.2: U1.4@101.318,18.701 101.671,19.054 101.671,19.271 102.125,19.725 C18.1@102.125,19.975
Net-(U3-BST): C30.1 U3.1 | length 1
  B.Cu w0.2: C30.1@98.25,11.475 98.625,11.475 98.95,11.15 U3.1@99.125,11.15
Net-(U3-EN): R7.2 U3.4 | length 1.3
  B.Cu w0.2: U3.4@101.625,13.05 101.8,13.05 102.437,12.412 R7.2@102.625,12.412
Net-(U3-FB): R11.2 R12.2 U3.3 | length 2.6
  B.Cu w0.2: R11.2@97.25,11.913 97.25,12.35 97.938,13.037 R12.2@98.125,13.037 98.137,13.05 U3.3@99.125,13.05
Net-(U3-SW): C30.2 L1.1 U3.6 | length 3.8
  B.Cu w0.2: C30.2@98.25,10.975 98.675,10.55 100.2,10.55 100.8,11.15 U3.6@101.625,11.15
Net-(U4-BG_A): R24.1 U4.11 | length 27.6
  F.Cu w0.2: U4.11@103.513,16.1 103.95,16.1 104.075,16.225 v1(104.25,16.225)
  F.Cu w0.25: R24.1@96.812,32.1 v1(97.125,32.1)
  In1.Cu w0.25: v3(103.625,13.725) 103.625,14.6 103.5,14.725 103.5,15.85 103.875,16.225 v1(104.25,16.225)
  In1.Cu w0.4: v1(97.125,32.1) v3(97.125,32.6)
  In3.Cu w0.25: v3(97.125,32.6) 97.75,31.975 98.375,31.975 99.875,30.475 101.5,30.475 102,29.975 102,16.35 103.625,14.725 v3(103.625,13.725)
Net-(U4-BG_B): R20.1 U4.10 | length 19
  F.Cu w0.2: U4.10@103.513,15.6 v1(104.125,15.6)
  In1.Cu w0.4: v1(104.125,15.6) v3(104.625,15.6) ; v3(104.75,31.85) v1(104.75,32.225)
  In3.Cu w0.25: v3(104.625,15.6) 103.125,17.1 103.125,30.225 v3(104.75,31.85)
Net-(U4-BG_C): R18.1 U4.9 | length 18.9
  F.Cu w0.2: U4.9@103.513,15.1 103.95,15.1 104.075,14.975 v1(104.25,14.975)
  F.Cu w0.25: v1(102.646,31.097) 102.649,31.1 R18.1@103.188,31.1
  In1.Cu w0.4: v3(102.5,30.725) 102.5,30.951 v1(102.646,31.097) ; v1(104.25,14.975) v3(104.5,14.725)
  In3.Cu w0.25: v3(102.5,30.725) 102.5,16.725 v3(104.5,14.725)
Net-(U4-BST_A): C44.1 U4.20 | length 1.1
  F.Cu w0.2: C44.1@98.75,16.475 99.125,16.1 U4.20@99.738,16.1
Net-(U4-BST_B): C43.1 U4.17 | length 1.3
  F.Cu w0.2: U4.17@100.875,17.237 100.875,18.35 C43.1@101,18.475
Net-(U4-BST_C): C42.1 U4.14 | length 1.1
  F.Cu w0.2: U4.14@102.375,17.237 102.375,17.975 C42.1@102.625,18.225
Net-(U4-DT): R16.2 U4.21 | length 0.7
  F.Cu w0.2: R16.2@98.988,15.6 U4.21@99.738,15.6
Net-(U4-TG_A): R23.1 U4.19 | length 21
  F.Cu w0.2: U4.19@99.738,16.6 99.737,16.713 v1(99.75,16.725)
  In1.Cu w0.25: v1(95.25,30.975) 95.25,30.725 97.75,28.225 99.25,28.225 101.375,26.1 101.375,21.1 101.75,20.725 101.75,19.475 102.25,18.975 102.25,17.85 101.625,17.225 101,17.225 100.5,17.725 100,17.725 99.625,17.35 99.625,16.85 v1(99.75,16.725)
Net-(U4-TG_B): R19.1 U4.16 | length 16
  F.Cu w0.2: U4.16@101.375,17.237 v1(101.375,17.85)
  In1.Cu w0.25: v1(95.25,29.85) 95.25,29.225 97.375,27.1 98.625,27.1 100.25,25.475 100.25,20.6 100.625,20.225 100.625,18.475 101.25,17.85 v1(101.375,17.85)
Net-(U4-TG_C): R17.1 U4.13 | length 13.8
  F.Cu w0.25: U4.13@102.875,17.237 102.988,17.35 v1(103.25,17.35) ; v1(103,28.975) 103,29.288 103.188,29.475 R17.1@103.188,30.1
  In1.Cu w0.25: v1(103,28.975) 102.5,28.475 102.5,21.6 102.875,21.225 102.875,19.85 103.25,19.475 v1(103.25,17.35)
PHA: C44.2 P9.PAD Q5.S Q6.D R2.1 R28.2 U4.18 | length 22.2
  F.Cu w0.2: R28.2@96.875,30.863 97.313,30.863 v1(97.325,30.875) ; R2.1@97.938,16.725 98.187,16.975 C44.2@98.75,16.975 99.125,16.975 99.375,17.225 100,17.225 100.125,17.1 v1(100.25,17.1) U4.18@100.25,17.113
  In1.Cu w0.2: v1@97.325,30.9 97.875,30.35 v3(97.875,30.225)
  In1.Cu w0.25: v3(97.875,30.225) 98,30.225 101.875,26.35 101.875,21.35 102.25,20.975 102.25,19.725 102.75,19.225 102.75,17.6 101.875,16.725 100.625,16.725 v1(100.25,17.1)
  In4.Cu w0.4: v2(97.875,29.725) v3(97.875,30.225)
  other v2: 96.375,32.975 96.375,33.35 96.75,33.35 97.125,33.35 96.375,33.725 96.75,33.725 97.125,33.725 96.375,34.1 96.75,34.1 97.125,34.1 96.375,34.475 96.75,34.475 97.125,34.475 96.375,34.85 96.75,34.85 97.125,34.85
  other v3: 96.5,35.225 97,35.225 96.5,35.725 97,35.725 96.5,36.225 97,36.225 96.5,36.725 97,36.725 97.5,36.725 96.5,37.225 97,37.225 97.5,37.225
  other v4: 95.175,38.1 97.825,38.1 95.175,38.725 97.825,38.725 95.175,39.35 97.825,39.35
PHB: C43.2 P10.PAD Q3.S Q4.D R3.1 R25.2 U4.15 | length 25.4
  F.Cu w0.2: v1(95.875,29.35) 96.75,29.35 96.875,29.475 R25.2@96.875,29.863 100.162,29.863 Q3.S@100.625,30.325 ; R3.1@97.938,17.6 98,17.6 v1(98.125,17.725) ; C43.2@101.5,18.475 v1(101.625,18.475) 101.875,18.225 U4.15@101.875,17.237
  In1.Cu w0.25: v1(95.875,29.35) 97.625,27.6 98.875,27.6 100.75,25.725 100.75,20.85 101.125,20.475 101.125,18.975 v3(101.274,18.826)
  In1.Cu w0.4: v3(97.875,17.475) v1(98.125,17.725) ; v3(101.274,18.826) v1(101.625,18.475)
  In4.Cu w0.2: v3(97.875,17.475) 99.25,18.85 101.25,18.85 v3(101.274,18.826)
  other v1: 100.125,29.6 100.5,29.6 100.875,29.6 101.25,29.6 100.125,29.975 100.5,29.975 100.875,29.975 101.25,29.975 100.125,30.35 100.5,30.35 100.875,30.35 101.25,30.35 100.125,30.725 100.5,30.725 100.875,30.725 101.25,30.725
  other v3: 100.125,31.225 100.625,31.225 101.125,31.225 100.125,31.725 100.625,31.725 101.125,31.725 100.125,32.225 100.625,32.225 101.125,32.225 100.125,32.725 100.625,32.725 101.125,32.725
  other v4: 98.675,38.1 101.325,38.1 98.675,38.725 101.325,38.725 98.675,39.35 101.325,39.35
PHC: C42.2 P11.PAD Q1.S Q2.D R5.1 R21.2 U4.12 | length 27.1
  F.Cu w0.2: v1(97.7,18.3) 97.875,18.475 R5.1@97.938,18.475 ; C42.2@103.125,18.225 103.5,18.225 103.75,17.975 103.75,17.1 103.513,16.863 U4.12@103.513,16.6 ; v1(103.625,28.975) 104.125,29.475 104.75,29.475 104.875,29.6 R21.2@104.875,29.863
  In1.Cu w0.2: v1(97.7,18.3) 97.25,17.85 97.25,16.975 98.5,15.725 99.75,15.725 100.25,16.225 102.125,16.225 102.625,16.725 v1(103.5,16.725)
  In1.Cu w0.25: v1(103.5,16.725) 103.875,17.1 103.875,17.6 103.75,17.725 103.75,19.725 103.375,20.1 103.375,21.475 103,21.85 103,28.225 103.625,28.85 v1(103.625,28.975)
  In1.Cu w0.4: v1(103.625,28.975) 103.625,29.35 v3(103.75,29.475)
  In4.Cu w0.4: v3(103.75,29.475) v2(103.75,29.975)
  other v2: 102.125,33.725 102.5,33.725 102.875,33.725 103.25,33.725 102.125,34.1 102.5,34.1 102.875,34.1 103.25,34.1 102.125,34.475 102.5,34.475 102.875,34.475 103.25,34.475 102.125,34.85 102.5,34.85 102.875,34.85 103.25,34.85
  other v3: 102.375,35.225 102.875,35.225 102.375,35.725 102.875,35.725 102.375,36.225 102.875,36.225 102.125,36.725 102.625,36.725 103.125,36.725 102.125,37.225 102.625,37.225 103.125,37.225
  other v4: 102.175,38.1 104.825,38.1 102.175,38.725 104.825,38.725 102.175,39.35 104.825,39.35
PWM-AN: U1.15 U4.1 | length 4.6
  F.Cu w0.2: v1(100.25,13.35) 100.362,13.463 U4.1@100.375,13.463
  In1.Cu w0.25: v3(99.875,12.6) 99.875,12.975 v1(100.25,13.35)
  In4.Cu w0.2: v3(99.875,12.6) 100,12.725 100,13.6 100.375,13.975 v2(100.375,14.1)
  B.Cu w0.2: v2(100.375,14.1) 100.5,14.225 100.875,14.225 101.125,14.475 101.125,14.811 U1.15@100.753,15.183
PWM-AP: U1.20 U4.22 | length 3.1
  F.Cu w0.2: v1(98.75,14.85) 99,15.1 U4.22@99.738,15.1
  In1.Cu w0.4: v3(98.5,15.1) v1(98.75,14.85)
  In4.Cu w0.4: v2(98,15.1) v3(98.5,15.1)
  B.Cu w0.2: v2(98,15.1) 98.283,15.1 U1.20@98.932,15.749
PWM-BN: U1.14 U4.2 | length 4.8
  F.Cu w0.2: v1(100.625,12.725) 100.875,12.975 U4.2@100.875,13.463
  In1.Cu w0.2: v1(100.625,12.725) 100.625,12.975 v3(101.125,13.475)
  In4.Cu w0.4: v2(100.75,13.6) 100.875,13.475 v3(101.125,13.475)
  B.Cu w0.2: v2(100.75,13.6) 100.875,13.725 101.125,13.725 101.625,14.225 101.625,14.876 U1.14@101.035,15.466
PWM-BP: U1.19 U4.23 | length 5.4
  F.Cu w0.2: v1(98.875,14.225) 99.25,14.6 U4.23@99.738,14.6
  In1.Cu w0.2: v1(98.875,14.225) 99.5,14.85 v3(99.5,14.975)
  In4.Cu w0.2: v2(98,14.475) 99,14.475 v3(99.5,14.975)
  B.Cu w0.2: v2(98,14.475) 98.224,14.475 U1.19@99.215,15.466
PWM-CN: U1.13 U4.3 | length 4.4
  F.Cu w0.2: v1(101.375,12.725) U4.3@101.375,13.463
  In1.Cu w0.2: v1(101.375,12.725) v3(102,13.35)
  In4.Cu w0.4: v3(102,13.35) v2(102,13.725)
  B.Cu w0.2: U1.13@101.318,15.749 102.125,14.942 102.125,13.85 v2(102,13.725)
PWM-CP: U1.18 U4.24 | length 3.7
  F.Cu w0.2: v1(99.625,13.975) 99.737,14.088 U4.24@99.738,14.1
  In1.Cu w0.2: v3(98.75,13.475) 99.125,13.475 v1(99.625,13.975)
  In4.Cu w0.2: v2(98.375,13.725) 98.625,13.475 v3(98.75,13.475)
  B.Cu w0.2: v2(98.375,13.725) 98.375,14.061 U1.18@99.497,15.183
PWM_IN-N: P4.PAD U1.9 | length 16.2
  In3.Cu w0.25: v3(95.5,8.35) 95.5,8.85 95.125,9.225 95.125,13.475 97.875,16.225 98.875,16.225 v3(99,16.35)
  In4.Cu w0.2: v3(99,16.35) 99.125,16.35 99.875,17.1 v2(103,17.1)
  In4.Cu w0.25: v2(95.125,7.6) 95.5,7.975 v3(95.5,8.35)
  B.Cu w0.2: U1.9@102.45,16.88 102.669,17.1 v2(103,17.1)
  other v2: 94.625,5.6 95.125,5.6 94.625,6.1 95.125,6.1 94.625,6.6 95.125,6.6 94.625,7.1 95.125,7.1 94.625,7.6
PWM_IN-P: P3.PAD U1.8 | length 16.5
  In1.Cu w0.25: v1(94.625,7.6) v3(94.625,8.35)
  In3.Cu w0.25: v3(94.625,8.35) 94.625,13.725 97.75,16.85 v3(98.375,16.85)
  In4.Cu w0.2: v3(98.375,16.85) 98.5,16.975 99.125,16.975 99.75,17.6 102.75,17.6 v2(102.875,17.725)
  B.Cu w0.2: U1.8@102.45,17.57 102.605,17.725 v2(102.875,17.725)
  other v1: 94.625,5.6 95.125,5.6 94.625,6.1 95.125,6.1 94.625,6.6 95.125,6.6 94.625,7.1 95.125,7.1 95.125,7.6
R: D1.4 U1.26 | length 2.1
  B.Cu w0.2: D1.4@97.237,19.588 97.237,18.698 U1.26@98.083,17.853
SWCLK: P6.PAD U1.24 | length 3.5
  In4.Cu w0.2: v3(94.75,16.85) 95.25,16.35 96.625,16.35 97.125,16.85 v2(97.5,16.85)
  B.Cu w0.2: v2(97.5,16.85) 97.53,16.88 U1.24@97.8,16.88
  other v1: 94.575,17.1 94.925,17.1
SWDIO: P5.PAD U1.23 | length 3.6
  In4.Cu w0.2: v3(94.75,15.85) 97.025,15.85 v2(97.4,16.225)
  B.Cu w0.2: v2(97.4,16.225) 97.711,16.225 U1.23@98.083,16.597
  other v1: 94.575,16.1 94.925,16.1
unconnected-(U1B-PA11-Pad21): U1.21
unconnected-(U1B-PA12-Pad22): U1.22
unconnected-(U1B-PA15-Pad25): U1.25
unconnected-(U1C-PB2-Pad16): U1.16
unconnected-(U1C-PB6-Pad29): U1.29
unconnected-(U1C-PB7-Pad30): U1.30
unconnected-(U1C-PB8-Pad32): U1.32
unconnected-(U1C-PD0-Pad2): U1.2
unconnected-(U1C-PD1-Pad3): U1.3
unconnected-(U4-MODE-Pad5): U4.5
unconnected-(U4-NC-Pad7): U4.7
unconnected-(U4-NC-Pad8): U4.8